# Altium PCB main.PcbDoc
Units mm, origin at the board's own origin, x right, y up, seen from the top; angles counter-clockwise.
Board outline 231.34 x 116.16 mm, 7 copper layers (Top Layer 1, Layer 2, Layer 3, Unused, Layer 4_pow, Layer 5_gnd, Bottom 6+gnd), stack 1.171 mm thick; 23 components, 0 nets, 229 pads, 0 vias.
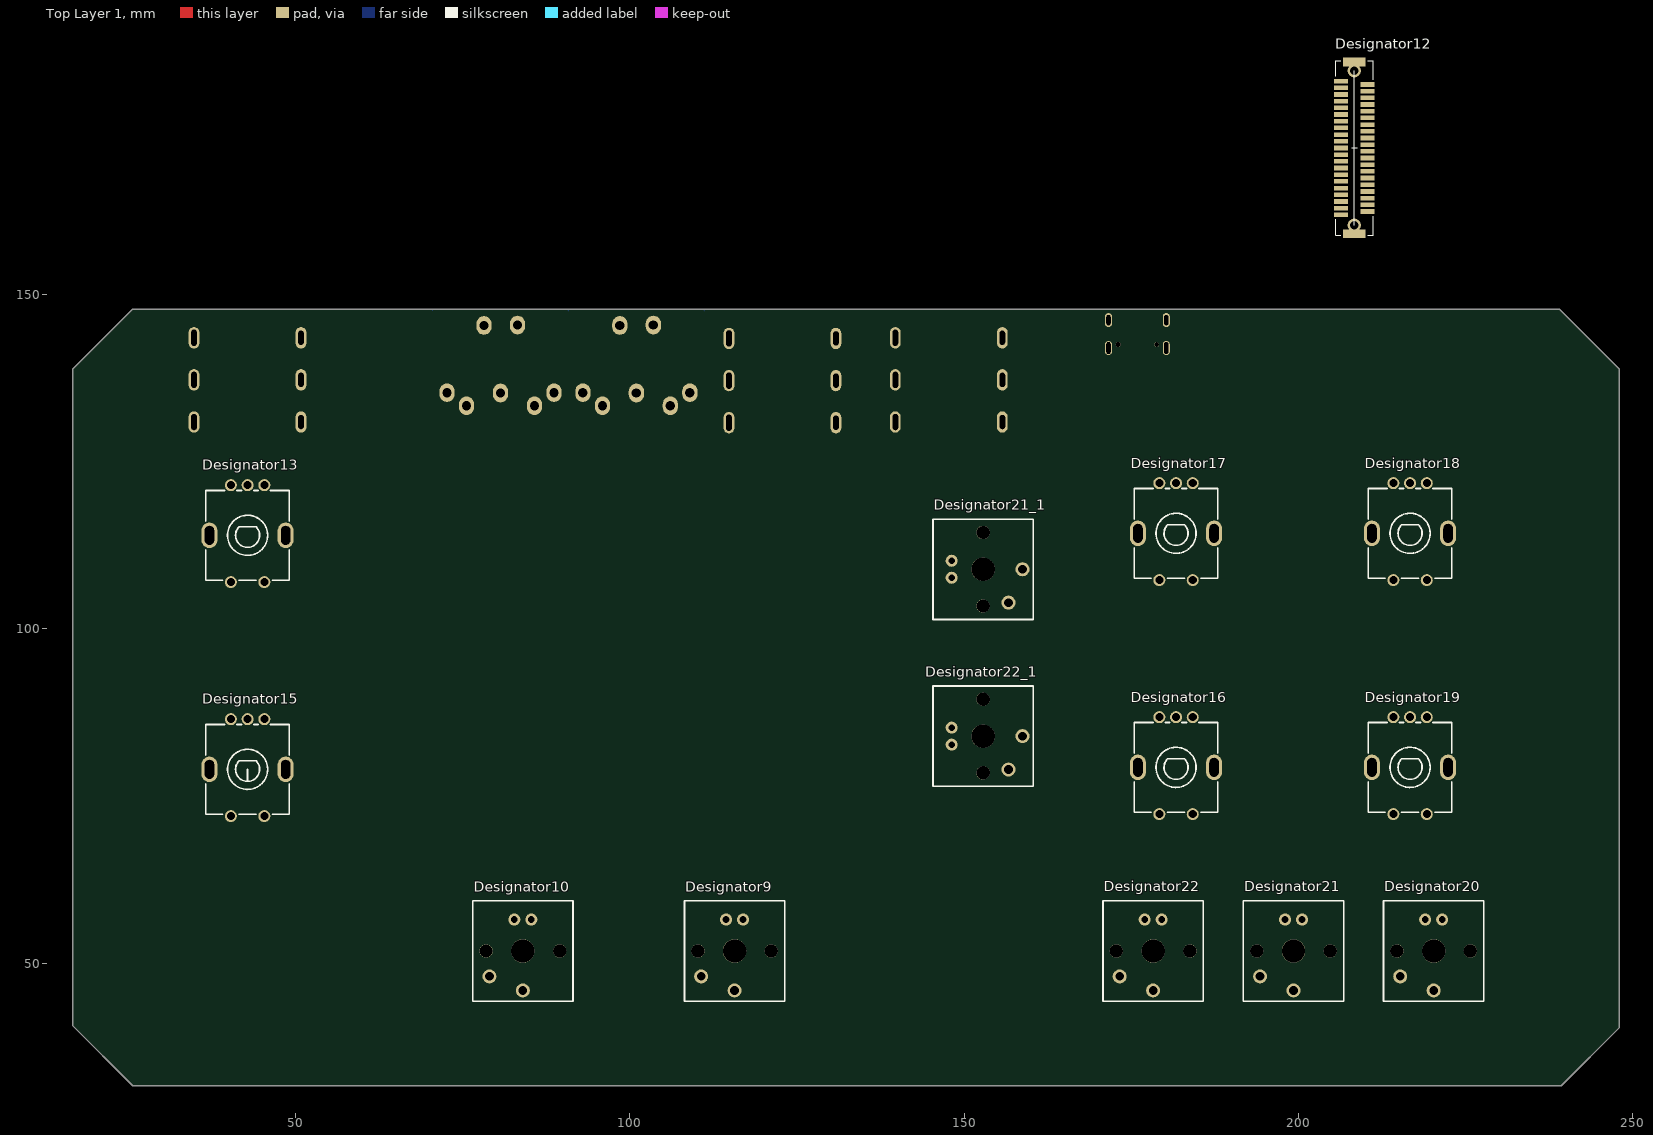
[diagram p0: Top Layer 1 view]
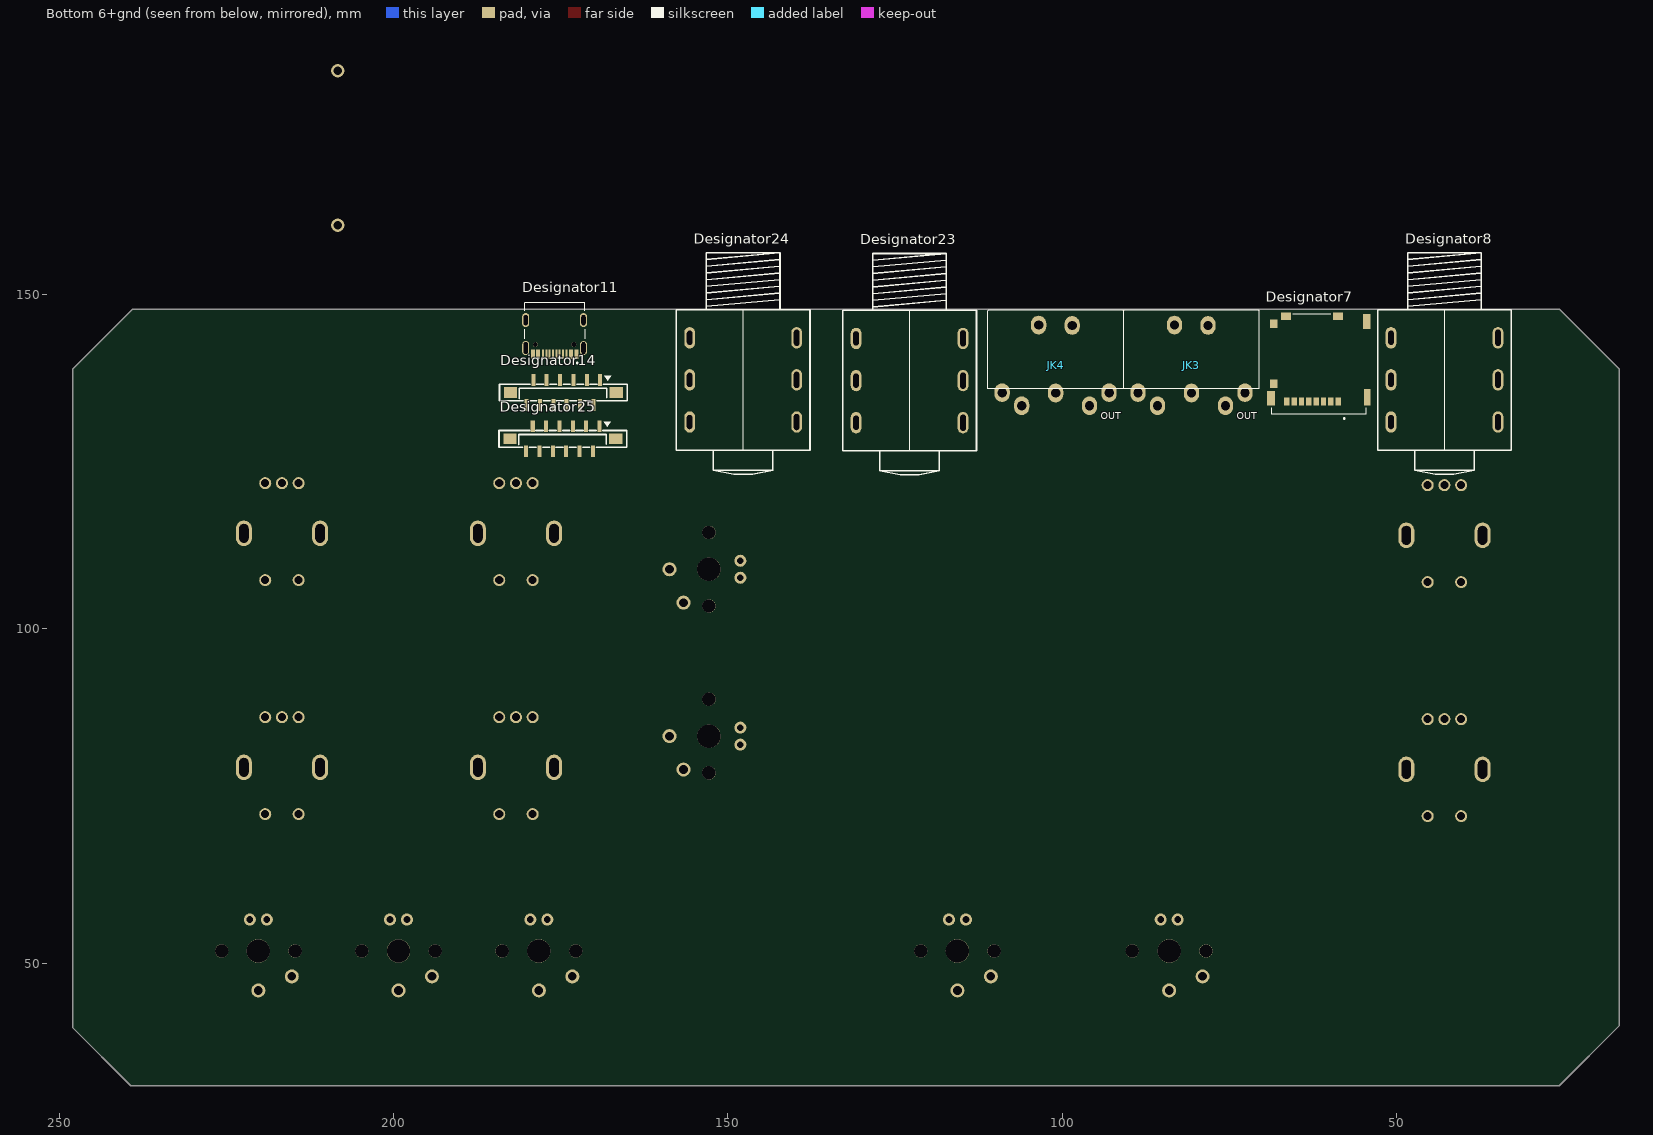
[diagram p1: Bottom 6+gnd view, seen from below]

## Layer stack, top to bottom
Top Solder: solder mask 0.0102, Solder Resist, Dk 3.5
Top Layer 1: signal copper 0.0356
Dielectric 1: dielectric 0.32, FR-4, Dk 4.8
Layer 2: signal copper 0.035
Dielectric 2: prepreg 0.0711, PP-006, Dk 4.1
Layer 3: signal copper 0.035
Dielectric 4: prepreg 0.0711, PP-006, Dk 4.1
Unused: signal copper 0.0356
Dielectric 5: prepreg 0.0711, PP-006, Dk 4.1
Layer 4_pow: signal copper 0.035
Dielectric 3: prepreg 0.0711, PP-006, Dk 4.1
Layer 5_gnd: signal copper 0.035
Dielectric2: dielectric 0.32, FR-4, Dk 4.8
Bottom 6+gnd: signal copper 0.0356
Bottom Solder: solder mask 0.0102, Solder Resist, Dk 3.5

## Board outline
16.643,40.64 16.643,138.804 25.643,147.804 238.986,147.804 247.986,138.804 247.986,40.341 239.285,31.64 25.643,31.64

## Design rules (kind name [scope] priority, off if disabled: settings)
Clearance [All] p1: gap=0.254 ignorepadtopadclearanceinfootprint=FALSE except(0: Arc-Hole Track-Hole SMDPad-Hole THPad-Hole Via-Hole Fill-Hole Poly-Hole Region-Hole Text-Hole)
PolygonConnect [All] p1: connectstyle=Relief reliefconductorwidth=0.254 reliefentries=4 polygonreliefangle="90 Angle" airgapwidth=0.254
RoutingVias [All] p1: holewidth=0.711 width=1.27 viastyle="Through Hole" minholewidth=0.711 minwidth=1.27 maxholewidth=0.711 maxwidth=1.27
SolderMaskExpansion [All] p1: expansion=0.102 istentingtop=FALSE
Width [All] p1: maxlimit=0.254 minlimit=0.254 preferedwidth=0.254
30 further rules are at their usual default settings.

## Components (designator, comment, footprint, x,y, rotation, side; value= is the part's Value field where it differs from the comment)
Designator7 "Comment" WM12834TR-ND 61.595,140.335 r0 bottom
Designator8 "Comment" PJ609AE 50.8,143.51 r270 bottom
Designator9 "Comment" Kailh_Low 115.648,51.798 r180 top
Designator10 "Comment" Kailh_Low 83.982,51.798 r180 top
Designator11 "Comment" "HRO_TYPE-C-31-M-12 - REZONIT" 175.895,146.15 r0 bottom
Designator12 "Comment" HIROSE_DF9-41P-1V(32) 206.375,161.9 r270 top
Designator13 "Comment" EC11_15mm 42.815,113.963 r180 top
Designator14 "Comment" AFA11-S12GLA-00 169.085,137.2 r0 bottom
Designator15 "Comment" EC11_15mm 42.815,78.963 r180 top
Designator16 "Comment" EC11_15mm 181.675,79.261 r180 top
Designator17 "Comment" EC11_15mm 181.675,114.261 r180 top
Designator18 "Comment" EC11_15mm 216.675,114.261 r180 top
Designator19 "Comment" EC11_15mm 216.675,79.261 r180 top
Designator20 "Comment" Kailh_Low 220.205,51.798 r180 top
Designator21 "Comment" Kailh_Low 199.247,51.798 r180 top
Designator21_1 "Comment" Kailh_Low 152.815,108.89 r270 top
Designator22 "Comment" Kailh_Low 178.247,51.798 r180 top
Designator22_1 "Comment" Kailh_Low 152.815,83.932 r270 top
Designator23 "Comment" PJ609AE 130.81,143.41 r270 bottom
Designator24 "Comment" PJ609AE 155.7,143.51 r270 bottom
Designator25 "Comment" AFA11-S12GLA-00 169.165,130.275 r0 bottom
JK3 "OUT" DIN5 80.645,140.335 r180 bottom
JK4 "OUT" DIN5 100.965,140.335 r180 bottom (schematic designator JK3)

## Footprints (in the part's own frame and the unit in brackets; to place one, negate y for a bottom-side part, rotate by r counter-clockwise, add the part's x,y. Pads: shape width x height; smd on the part's side, far side on the other; paste and mask are expansions set on the pad)
AFA11-S12GLA-00 [mm]
  rect 0.6x1.75 smd paste+0 mask+0.05: 1(0,0) 2(1,3.75) 3(2,0) 4(3,3.75) 5(4,0) 6(5,3.75) 7(6,0) 8(7,3.75) 9(8,0) 10(9,3.75) 11(10,0) 12(11,3.75)
  rect 2x1.6 smd paste+0 mask+0.05: 13(13.4,1.875) 14(-2.4,1.875)
  silkscreen extent -4.04,-0.66 15.04,3.13, body extent -3.69,-0.35 14.71,4.16, height 5.35
DIN5 [mil] "PCB mount"
  oval 90x110 hole 55: 1(315,-198) 2(0,-200) 3(-315,-198) 4(200,-275) 5(-200,-275) 6(-100,200) 6(97.5,197.5)
  Top Layer 1 lines w5: 400,285 398,287 ; -398,287 -400,285
  silkscreen extent -400,-175 400,287, body extent -398,-299 398,290, height 815
EC11_15mm [mm]
  round 1.8 hole 1.2: 1(-2.5,7) 2(2.5,7) A(-2.5,-7.5) B(2.5,-7.5) C(0,-7.5)
  oval 2.4x3.8 hole 1.4 slot 2.8 at 90 deg: MT1(-5.7,0) MT2(5.7,0)
  silkscreen extent -6.25,-6.7 6.25,6.7, body extent -6,-7.67 6,7.25, height 21.9
HIROSE_DF9-41P-1V(32) [mil]
  rect 28x82 smd: 1(0,0) 2(-20,154) 3(-39,0) 4(-59,154) 5(-79,0) 6(-98,154) 7(-118,0) 8(-138,154) 9(-157,0) 10(-177,154) 11(-197,0) 12(-217,154) 13(-236,0) 14(-256,154) 15(-276,0) 16(-295,154) 17(-315,0) 18(-335,154) 19(-354,0) 20(-374,154) 21(-394,0) 22(-413,154) 23(-433,0) 24(-453,154) 25(-472,0) 26(-492,154) 27(-512,0) 28(-531,154) 29(-551,0) 30(-571,154) 31(-591,0) 32(-610,154) 33(-630,0) 34(-650,154) 35(-669,0) 36(-689,154) 37(-709,0) 38(-728,154) 39(-748,0) 40(-768,154) 41(-787,0)
  round 78 hole 52: 42(-848,77) 43(61,77)
  rect 51x134 smd: 44(-900,77) 45(112,77)
  silkscreen extent -907,-32 120,188, body extent -921,-2 134,156, height 134
"HRO_TYPE-C-31-M-12 - REZONIT" [mm]
  rect 0.6x1.45 smd: A1B12(-3.25,5.095) A4B9(-2.45,5.095) B1A12(3.25,5.095) B4A9(2.45,5.095)
  rect 0.3x1.45 smd: A5(-1.25,5.095) A6(-0.25,5.095) A7(0.25,5.095) A8(1.25,5.095) B5(1.75,5.095) B6(0.75,5.095) B7(-0.75,5.095) B8(-1.75,5.095)
  oval 1.05x2.1 hole 0.6 slot 1.75 at 90 deg: S1(-4.32,4.18) S2(4.32,4.18)
  oval 1.05x2.1 hole 0.6 slot 1.5 at 90 deg: S3(-4.32,0) S4(4.32,0)
  round 0.7 hole 0.7 unplated: ""(-2.89,3.65) ""(2.89,3.65)
  silkscreen extent -4.47,-2.6 4.47,6.5, body extent -4.47,-2.6 4.47,5.3, height 3.31
Kailh_Low [mm]
  round 2.1 hole 1.3: 1(0,5.9) 2(5,3.8)
  round 1.8 hole 1: 3(-1.27,-4.699) 4(1.27,-4.699)
  round 2 hole 2 unplated: ""(-5.5,0) ""(5.5,0)
  round 3.5 hole 3.5 unplated: ""(0,0)
  silkscreen extent -7.5,-7.5 7.5,7.5, body extent -7.5,-7.5 7.5,7.5, height 8
PJ609AE [mm] "HOOYA"
  oval 3.2x1.6 hole 0.8 slot 2.1 at 0 deg paste-2539.97 mask+0.051: 2(0,0) 4(6.3,0) 6(12.6,0)
  oval 3.2x1.6 hole 0.8 slot 2.4 at 0 deg paste-2539.97 mask+0.051: 3(0,16) 5(6.3,16) 7(12.6,16)
  silkscreen extent -12.7,-2 20.4,18, body extent -12.16,-1.4 21.2,17.09, height 16.2
WM12834TR-ND [mm]
  rect 0.8x1.24 smd: 1(-2.9,6.355) 2(-1.8,6.355) 3(-0.7,6.355) 4(0.4,6.355) 5(1.5,6.355) 6(2.6,6.355) 7(3.7,6.355) 8(4.8,6.355)
  rect 1.16x1.2 smd: DT(6.74,-5.275)
  rect 0.95x2.5 smd: P1(-7.245,5.725)
  rect 1.15x2.2 smd: P2(7.145,5.875) P3(-7.145,-5.605)
  rect 1.5x1.15 smd: P4(-2.84,-6.4) P5(4.94,-6.4)
  rect 1.16x1.25 smd: SW(6.74,3.725)
  silkscreen extent -7.07,-6.73 7.07,8.99, body extent -7.42,-6.75 7.52,8.2, height 1.47

## Part data
JK3 JK4: library part DIN5, "DIN5"

## Nets (pads, with @x,y where several pads share a name; then routed paths per layer and width w, separated by ;. In a path a pad name is that pad's centre, name@x,y a point inside that pad or via, vN(x,y) a via of type N, cw(c..) or ccw(c..) an arc to the next point about the centre after c; other vN are vias at no path point)
pads on no net: Designator7.1 Designator7.2 Designator7.3 Designator7.4 Designator7.5 Designator7.6 Designator7.7 Designator7.8 Designator7.DT Designator7.P1 Designator7.P2 Designator7.P3 Designator7.P4 Designator7.P5 Designator7.SW Designator8.2 Designator8.3 Designator8.4 Designator8.5 Designator8.6 Designator8.7 Designator9. Designator9.1 Designator9.2 Designator9.3 Designator9.4 Designator10. Designator10.1 Designator10.2 Designator10.3 Designator10.4 Designator11. Designator11.A1B12 Designator11.A4B9 Designator11.A5 Designator11.A6 Designator11.A7 Designator11.A8 Designator11.B1A12 Designator11.B4A9 Designator11.B5 Designator11.B6 Designator11.B7 Designator11.B8 Designator11.S1 Designator11.S2 Designator11.S3 Designator11.S4 Designator12.1 Designator12.2 Designator12.3 Designator12.4 Designator12.5 Designator12.6 Designator12.7 Designator12.8 Designator12.9 Designator12.10 Designator12.11 Designator12.12 Designator12.13 Designator12.14 Designator12.15 Designator12.16 Designator12.17 Designator12.18 Designator12.19 Designator12.20 Designator12.21 Designator12.22 Designator12.23 Designator12.24 Designator12.25 Designator12.26 Designator12.27 Designator12.28 Designator12.29 Designator12.30 Designator12.31 Designator12.32 Designator12.33 Designator12.34 Designator12.35 Designator12.36 Designator12.37 Designator12.38 Designator12.39 Designator12.40 Designator12.41 Designator12.42 Designator12.43 Designator12.44 Designator12.45 Designator13.1 Designator13.2 Designator13.A Designator13.B Designator13.C Designator13.MT1 Designator13.MT2 Designator14.1 Designator14.2 Designator14.3 Designator14.4 Designator14.5 Designator14.6 Designator14.7 Designator14.8 Designator14.9 Designator14.10 Designator14.11 Designator14.12 Designator14.13 Designator14.14 Designator15.1 Designator15.2 Designator15.A Designator15.B Designator15.C Designator15.MT1 Designator15.MT2 Designator16.1 Designator16.2 Designator16.A Designator16.B Designator16.C Designator16.MT1 Designator16.MT2 Designator17.1 Designator17.2 Designator17.A Designator17.B Designator17.C Designator17.MT1 Designator17.MT2 Designator18.1 Designator18.2 Designator18.A Designator18.B Designator18.C Designator18.MT1 Designator18.MT2 Designator19.1 Designator19.2 Designator19.A Designator19.B Designator19.C Designator19.MT1 Designator19.MT2 Designator20. Designator20.1 Designator20.2 Designator20.3 Designator20.4 Designator21. Designator21.1 Designator21.2 Designator21.3 Designator21.4 Designator21_1. Designator21_1.1 Designator21_1.2 Designator21_1.3 Designator21_1.4 Designator22. Designator22.1 Designator22.2 Designator22.3 Designator22.4 Designator22_1. Designator22_1.1 Designator22_1.2 Designator22_1.3 Designator22_1.4 Designator23.2 Designator23.3 Designator23.4 Designator23.5 Designator23.6 Designator23.7 Designator24.2 Designator24.3 Designator24.4 Designator24.5 Designator24.6 Designator24.7 Designator25.1 Designator25.2 Designator25.3 Designator25.4 Designator25.5 Designator25.6 Designator25.7 Designator25.8 Designator25.9 Designator25.10 Designator25.11 Designator25.12 Designator25.13 Designator25.14 JK3.1 JK3.2 JK3.3 JK3.4 JK3.5 JK3.6 JK4.1 JK4.2 JK4.3 JK4.4 JK4.5 JK4.6

## Silkscreen, mask and mechanical layers (free items; w line width, h text height)
Top Overlay:
  lines w0.254: 42.815,77.2 42.815,78.963
Outline:
  circle w0.013: c220.205,51.798 r1.5
  circle w0.013: c199.205,51.798 r1.5
  circle w0.013: c178.247,51.798 r1.5
  circle w0.013: c216.705,113.963 r1.5
  circle w0.013: c216.705,78.963 r1.5
  circle w0.013: c181.705,78.963 r1.5
  circle w0.013: c181.705,113.963 r1.5
  circle w0.013: c152.815,83.932 r1.5
  circle w0.013: c152.815,108.89 r1.5
  circle w0.013: c99.815,96.357 r1.5
  circle w0.013: c83.982,51.798 r1.5
  circle w0.013: c115.648,51.798 r1.5
  circle w0.013: c42.815,78.963 r1.5
  circle w0.013: c42.815,113.963 r1.5
  lines w0.013: 16.643,138.804 16.643,40.64 25.643,31.64 238.987,31.64 239.285,31.64 247.986,40.341 247.986,138.804 238.986,147.804 25.643,147.804
  lines w0.1: 16.643,138.804 25.643,147.804